# Altium PCB gecko3.PcbDoc (part 4 of 8)
Units mm, origin at the board's own origin, x right, y up, seen from the top; angles counter-clockwise.
Board outline 85.5 x 54.02 mm, 10 copper layers (Top Layer, MidLayer1, 1.2 & 2.5V Plane, GND Plane1, DDR layer 1, 3.3V Plane, DDR layer 2, GND Plane2, MidLayer2, Bottom Layer), stack 1.39 mm thick; 295 components, 567 nets, 2310 pads, 1568 vias.
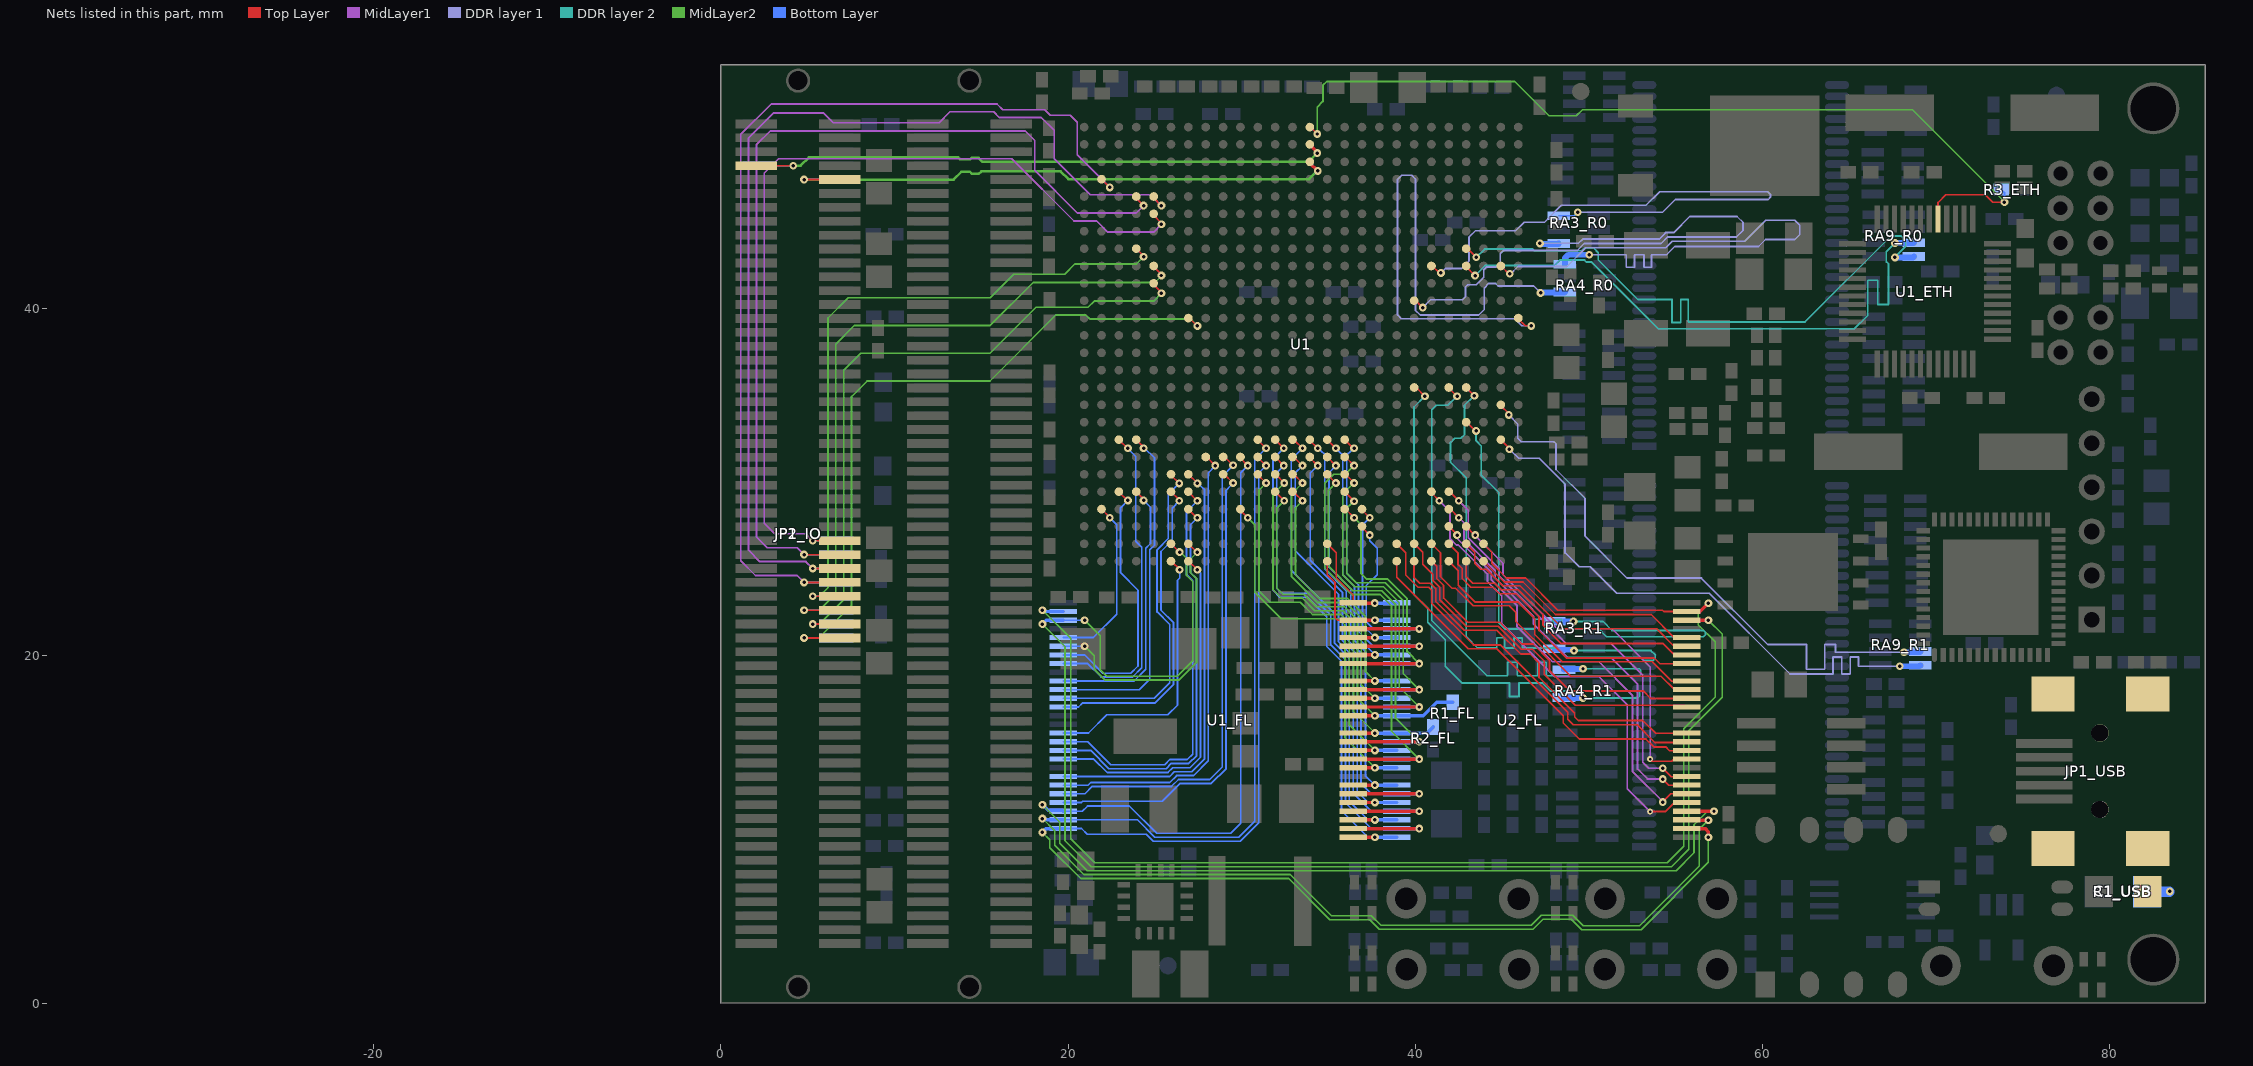
[diagram p12: the nets of this part, all layers, seen from the top]

## Via types
v1: diameter 0.45, hole 0.2, Top Layer to Bottom Layer, tented both sides, 1470 vias
v2: diameter 0.45, hole 0.2, Top Layer to Bottom Layer, tented bottom, 62 vias
v3: diameter 0.35, hole 0.15, Top Layer to MidLayer1, tented both sides, 26 vias
v4: diameter 0.45, hole 0.2, MidLayer2 to Bottom Layer, tented both sides, 10 vias

## Nets (pads, with @x,y where several pads share a name; then routed paths per layer and width w, separated by ;. In a path a pad name is that pad's centre, name@x,y a point inside that pad or via, vN(x,y) a via of type N, cw(c..) or ccw(c..) an arc to the next point about the centre after c; other vN are vias at no path point) (continued)
DRAM_LDM0: RA4_R0.4 U1.V2 | length 36.7
  Top Layer w0.1: U1.V2@44.927,42.449 44.927,42.498 U1.V2@44.952,42.473 ; U1.V2@44.962,42.419 45.411,41.971 v1@45.436,41.946
  DDR layer 1 w0.101: v1@45.436,41.946 45.461,41.971 45.911,42.421 48.736,42.421 49.811,43.496 54.411,43.496 54.789,43.874 58.964,43.874 60.173,45.084 61.848,45.084 62.136,44.796 62.136,44.261 61.85,43.975 60.165,43.975 59.761,43.571 54.936,43.571 54.462,43.097 53.6,43.097 53.6,42.375 53.175,42.375 53.175,43.097 52.625,43.097 52.625,42.375 52.15,42.375 52.15,43.097 v1(50.011,43.097)
  Bottom Layer w0.34: RA4_R0.4@48.611,42.546 48.611,42.896 48.812,43.097 v1(50.011,43.097)
  other v1: 45.436,41.996
DRAM_LDM1: RA4_R1.4 U1.L5 | length 35.9
  Top Layer w0.101: U1.L5@41.927,35.449 41.927,35.423 v1(42.4,34.95)
  DDR layer 2 w0.101: v1(42.4,34.95) 41.875,34.425 41.2,34.425 40.944,34.169 40.944,22.031 44.125,18.85 44.5,18.85 44.5,18.846 45.3,18.846 45.3,19.625 45.875,19.625 45.875,18.846 47.061,18.846 47.061,19.625 47.536,19.625 47.536,18.846 52.911,18.846 52.986,18.921 52.986,19.171 52.911,19.246 v1@49.655,19.246
  Bottom Layer w0.34: RA4_R1.4@48.561,19.196 48.612,19.247 v1(49.655,19.247)
DRAM_LDQS0: RA4_R0.2 U1.R1 | length 35.9
  Top Layer w0.1: U1.R1@45.927,39.449 45.927,39.398 46.325,39 v1(46.675,39)
  DDR layer 1 w0.101: v1(46.675,39) 46.125,39 45.722,39.403 39.197,39.403 38.977,39.623 38.977,47.437 39.211,47.671 39.786,47.671 40.002,47.455 40.002,39.903 40.277,39.628 43.644,39.628 43.961,39.945 43.961,41.171 44.236,41.446 44.611,41.446 44.761,41.296 46.811,41.296 v1(47.211,40.896)
  Bottom Layer w0.34: v1@47.211,40.921 48.586,40.921 RA4_R0.2@48.611,40.946
DRAM_LDQS1: RA4_R1.2 U1.L7 | length 35.4
  Top Layer w0.1: U1.L7@39.927,35.449 U1.L7@40.001,35.449
  Top Layer w0.101: U1.L7@39.927,35.449 40.051,35.449 v1(40.55,34.95)
  DDR layer 2 w0.101: v1(40.55,34.95) 39.925,34.325 39.925,23.525 40.718,22.732 40.718,21.932 41.725,20.925 41.725,19.4 42.7,18.425 45.425,18.425 45.425,17.65 45.975,17.65 45.975,18.425 47.325,18.425 47.779,17.971 52.813,17.971 52.912,17.872 52.912,17.672 52.811,17.571 v1(49.655,17.571)
  Bottom Layer w0.34: RA4_R1.2@48.561,17.596 48.586,17.571 v1(49.655,17.571)
DRAM_R\A\S\0: RA3_R0.3 U1.V6 | length 35.4
  Top Layer w0.101: U1.V6@40.927,42.449 40.976,42.449 41.375,42.05 v1(41.475,42.05)
  DDR layer 1 w0.101: v1(41.475,42.05) 41.721,42.296 42.661,42.296 43.086,42.721 43.086,44.096 43.465,44.475 45.765,44.475 46.261,44.971 47.436,44.971 48.411,45.946 53.286,45.946 54.068,46.728 60.297,46.728 60.45,46.575 60.45,46.4 60.325,46.275 54.965,46.275 54.236,45.546 v1(49.355,45.546)
  Bottom Layer w0.101: RA3_R0.3@48.261,45.346 49.155,45.346 v1(49.355,45.546) ; v1@49.32,45.546 49.32,45.58 v1@49.336,45.596
DRAM_R\A\S\1: RA3_R1.3 U1.J4 | length 35.9
  Top Layer w0.1: U1.J4@42.927,33.449 42.951,33.449 v1@43.45,32.95
  DDR layer 2 w0.101: v1(43.5,32.95) 43.5,32.38 43.8,32.08 43.8,30.4 44.8,29.4 44.8,21.9 45.154,21.546 46.875,21.546 46.875,22.096 47.45,22.096 47.45,21.55 47.925,21.55 47.925,22.096 48.425,22.096 48.425,21.546 50.561,21.546 51.011,21.096 56.586,21.096 56.711,21.221 56.711,21.346 56.601,21.456 51.326,21.456 50.811,21.971 v1(49.1,21.975)
  Bottom Layer w0.34: RA3_R1.3@48.011,21.996 48.036,21.971 v1(49.1,21.975)
DRAM_UDM0: RA9_R0.7 U1.V4 | length 35.2
  Top Layer w0.101: U1.V4@42.927,42.449 42.927,42.405 v1(43.436,41.896)
  DDR layer 2 w0.1: v1(43.436,41.896) 44.015,42.475 48.015,42.475 48.336,42.796 49.736,42.796 49.861,42.671 50.161,42.671 53.995,38.837 65.287,38.837 66.05,39.6 66.05,41.625 66.625,41.625 66.625,40.225 67.25,40.225 67.25,42.575 67.125,42.7 67.125,43.275 v1(67.616,43.766)
  Bottom Layer w0.34: v1(67.616,43.766) 68.684,43.766 RA9_R0.7@68.709,43.791
DRAM_UDM1: RA9_R1.7 U1.K2 | length 35.9
  Top Layer w0.1: U1.K2@44.927,34.449 44.927,34.398 45.375,33.95 v1(45.375,33.875)
  DDR layer 1 w0.101: v1(45.375,33.875) 45.9,33.35 45.9,32.525 46.1,32.325 47.975,32.325 48.1,32.2 48.1,30.73 49.775,29.055 49.775,26.887 52.188,24.474 56.476,24.474 60.3,20.65 62.525,20.65 62.525,19.225 63.575,19.225 63.575,20.65 64.2,20.65 64.2,20.2 v1(68.15,20.2)
  Bottom Layer w0.34: v1(68.15,20.2) 69.061,20.221 RA9_R1.7@69.086,20.246
DRAM_UDQS0: RA9_R0.8 U1.W4 | length 35.8
  Top Layer w0.1: U1.W4@42.927,43.449 43.008,43.449 v1(43.511,42.946)
  DDR layer 2 w0.1: 49.739,43.499 50.258,43.499 50.536,43.221 50.536,42.796 52.811,40.521 54.786,40.521 ; 62.436,39.221 67.39,44.175 67.975,44.175 68.25,43.9 68.25,43.575 v1(67.616,42.94)
  DDR layer 2 w0.101: v1(43.511,42.946) 43.986,43.421 46.761,43.421 46.852,43.33 49.57,43.33 49.739,43.499 ; 54.786,40.521 54.786,39.196 55.286,39.196 55.286,40.521 55.711,40.521 55.711,39.221 62.436,39.221
  Bottom Layer w0.34: v1(67.616,42.94) 68.659,42.94 RA9_R0.8@68.709,42.991
DRAM_UDQS1: RA9_R1.8 U1.H2 | length 35.5
  Top Layer w0.101: U1.H2@44.927,32.449 v1@45.414,31.961
  DDR layer 1 w0.101: v1@45.421,31.904 45.947,31.378 47.127,31.378 48.625,29.88 48.625,25.925 49.429,25.121 50.066,25.121 51.591,23.596 56.929,23.596 61.575,18.95 64.05,18.95 64.05,19.925 64.55,19.925 64.55,18.95 65.05,18.95 65.05,19.925 65.525,19.925 65.525,19.4 ; 65.525,19.395 v1(67.892,19.395)
  Bottom Layer w0.34: v1(67.892,19.395) 69.035,19.395 RA9_R1.8@69.086,19.446
  other v1: 45.414,31.897
DRAM_W\E\0: RA3_R0.1 U1.T7 | length 35.9
  Top Layer w0.1: U1.T7@39.927,40.449 40.026,40.449 v1(40.425,40.05)
  DDR layer 1 w0.1: v1(40.425,40.05) 40.875,40.5 42.715,40.5 42.886,40.671 42.886,41.246 43.011,41.371 43.511,41.371 43.936,41.796 43.936,42.221 44.111,42.396 44.661,42.396 44.886,42.621 44.886,43.146 45.086,43.346 49.336,43.346 49.736,43.746 54.161,43.746 54.536,44.121 57.386,44.121 ; v1@47.168,43.721 v1(47.175,43.75) 49.386,43.746 49.636,43.996 54.036,43.996 54.411,44.371 54.871,44.371 55.8,45.3 57.082,45.3
  DDR layer 1 w0.101: 57.082,45.3 58.525,45.3 58.875,44.95 58.875,44.5 58.496,44.121 57.386,44.121
  Bottom Layer w0.34: v1@47.167,43.721 47.175,43.721 48.236,43.721 RA3_R0.1@48.261,43.746
DRAM_W\E\1: RA3_R1.1 U1.L4 | length 35.7
  Top Layer w0.1: U1.L4@42.927,35.449 42.927,35.438 43.397,34.968 v1@43.415,34.95
  DDR layer 2 w0.101: v1@43.385,34.985 42.827,34.427 42.827,32.727 42.625,32.525 42.275,32.525 42.025,32.275 42.025,31.15 42.925,30.25 42.925,21.107 43.582,20.45 44.686,20.45 44.686,21.044 45.136,21.044 45.136,20.45 45.675,20.45 45.675,21.025 46.15,21.025 46.15,20.45 48.15,20.45 48.701,19.899 52.988,19.899 53.166,19.721 53.661,19.721 53.811,19.871 53.811,20.051 53.566,20.296 v1(49.136,20.296) ; v1@43.4,34.975 v1@43.402,34.973
  Bottom Layer w0.34: RA3_R1.1@48.011,20.396 48.062,20.345 v1@49.105,20.345
  other v1: 43.4,34.97
EARTH: C1_USB.1 JP1_USB. JP1_USB.shield R1_USB.1 | length 1.3
  Bottom Layer w0.6: R1_USB.1@82.133,6.405 v1@83.43,6.405
  other v1: 83.45,6.425
ENCODER0: JP1_IO.62 JP2_IO.62 U1.AA22 | length 52.2
  Top Layer w0.1: v1(5.3,26.625) JP2_IO.62@6.85,26.625 ; U1.AA22@24.927,45.449 24.927,45.373 25.375,44.925 v1(25.375,44.85)
  MidLayer1 w0.1: v1(5.3,26.625) 4.9,27.025 3.1,27.025 2.5,27.625 2.5,47.8 3.325,48.625 16.75,48.625 20.337,45.038 21.643,45.038 22.28,44.4 24.925,44.4 v1(25.375,44.85)
  Bottom Layer w0.1: v1(5.3,26.625) JP1_IO.62@6.65,26.625
ENCODER1: JP1_IO.64 JP2_IO.64 U1.AB23 | length 56.1
  Top Layer w0.1: v1(4.8,25.825) JP2_IO.64@6.85,25.825 ; U1.AB23@23.927,46.449 23.927,46.348 v1(24.35,45.925)
  MidLayer1 w0.1: v1(4.8,25.825) 4.4,26.225 2.675,26.225 2.05,26.85 2.05,49.425 2.85,50.225 17.525,50.225 18.075,49.675 18.075,47.955 20.53,45.5 23.925,45.5 v1(24.35,45.925)
  Bottom Layer w0.1: v1(4.8,25.825) JP1_IO.64@6.65,25.825
ENCODER2: JP1_IO.66 JP2_IO.66 U1.AB22 | length 59.5
  Top Layer w0.1: v1(5.3,25.025) JP2_IO.66@6.85,25.025 ; U1.AB22@24.927,46.449 24.927,46.373 v1(25.375,45.925)
  MidLayer1 w0.1: v1(5.3,25.025) 4.9,25.425 2.25,25.425 1.6,26.075 1.6,49.825 3.027,51.253 5.922,51.253 6.472,50.703 12.578,50.703 13.2,51.325 15.718,51.325 16.043,51 18.455,51 19.2,50.255 19.2,48.63 21.28,46.55 24.75,46.55 v1(25.375,45.925)
  Bottom Layer w0.1: v1(5.3,25.025) JP1_IO.66@6.65,25.025
ENCODER3: JP1_IO.68 JP2_IO.68 U1.AC25 | length 58.3
  Top Layer w0.1: v1(4.8,24.225) JP2_IO.68@6.85,24.225 ; U1.AC25@21.927,47.449 v1(22.4,46.975)
  MidLayer1 w0.1: v1(4.8,24.225) 4.4,24.625 2,24.625 1.15,25.475 1.15,50.024 2.902,51.776 15.904,51.776 16.23,51.45 18.65,51.45 18.975,51.125 20.125,51.125 20.525,50.725 20.525,48.85 v1(22.4,46.975)
  Bottom Layer w0.1: v1(4.8,24.225) JP1_IO.68@6.65,24.225
ENCODER4: JP1_IO.70 JP2_IO.70 U1.W23 | length 39.8
  Top Layer w0.1: v1(5.3,23.425) JP2_IO.70@6.85,23.425 ; U1.W23@23.927,43.449 24.35,43.026 v1(24.35,42.975)
  MidLayer2 w0.1: v1(5.3,23.425) 5.675,23.425 6.175,23.925 6.175,39.45 7.35,40.625 15.525,40.625 16.869,41.969 19.799,41.969 20.399,42.569 23.944,42.569 v1(24.35,42.975)
  Bottom Layer w0.1: v1(5.3,23.425) JP1_IO.70@6.65,23.425
ENCODER5: JP1_IO.72 JP2_IO.72 U1.V22 | length 41.6
  Top Layer w0.1: v1(4.8,22.625) JP2_IO.72@6.85,22.625 ; U1.V22@24.927,42.398 v1@25.415,41.91
  MidLayer2 w0.1: v1(4.8,22.625) 5.675,22.625 6.625,23.575 6.625,37.95 7.7,39.025 15.525,39.025 18,41.5 25.006,41.5 v1@25.415,41.91
  Bottom Layer w0.1: v1(4.8,22.625) JP1_IO.72@6.65,22.625
  other v1: 25.375,41.9
ENCODER6: JP1_IO.74 JP2_IO.74 U1.U22 | length 39.4
  Top Layer w0.1: v1(5.3,21.825) JP2_IO.74@6.85,21.825 ; U1.U22@24.927,41.449 24.927,41.373 v1@25.425,40.875
  MidLayer2 w0.1: v1(5.3,21.825) 5.675,21.825 7.075,23.225 7.075,36.45 8.05,37.425 15.5,37.425 18.15,40.075 21.15,40.075 21.5,40.425 24.925,40.425 v1(25.375,40.875)
  Bottom Layer w0.1: v1(5.3,21.825) JP1_IO.74@6.65,21.825
ENCODER7: JP1_IO.76 JP2_IO.76 U1.R20 | length 42.2
  Top Layer w0.1: v1@4.825,21.025 JP2_IO.76@6.85,21.025 ; U1.R20@26.927,39.449 26.976,39.449 v1@27.425,39
  MidLayer2 w0.1: v1(4.8,21.025) 5.65,21.025 7.525,22.9 7.525,34.925 8.425,35.825 15.5,35.825 19.3,39.625 21.025,39.625 21.25,39.4 27.05,39.4 v1(27.45,39)
  Bottom Layer w0.1: v1(4.8,21.025) 4.825,21.025 JP1_IO.76@6.65,21.025
ETH_R\E\S\E\T\: R3_ETH.2 U1.AF13 U1_ETH.29 | length 52.2
  Top Layer w0.1: U1.AF13@33.927,50.449 33.951,50.449 v1(34.35,50.05) ; U1_ETH.29@70.1,45.15 70.1,46.1 70.55,46.55 72.825,46.55 73.25,46.125 v1(73.925,46.125)
  MidLayer2 w0.1: v1(34.35,50.05) 34.35,51.6 34.675,51.925 34.675,52.85 34.9,53.075 45.725,53.075 47.7,51.1 49.275,51.1 49.625,51.45 68.63,51.45 v1@73.927,46.153
  Bottom Layer w0.1: R3_ETH.2@73.55,46.85 R3_ETH.2@73.75,46.65 ; R3_ETH.2@73.75,46.85 73.925,46.675 v1(73.925,46.125)
EXTCLK0: JP1_IO.7 JP2_IO.7 U1.AE13 | length 35.5
  Top Layer w0.1: JP2_IO.7@2.05,48.225 v1(4.175,48.225)
  Top Layer w0.2: U1.AE13@33.927,49.449 33.927,49.423 34.35,49 v1(34.35,48.95)
  MidLayer2 w0.15: v1(4.175,48.225) 4.6,48.225 5.075,48.7 13.675,48.7 13.775,48.6 14.375,48.6 14.45,48.675 14.85,48.675 15.075,48.45 33.85,48.45 v1(34.35,48.95)
  Bottom Layer w0.1: JP1_IO.7@2.25,48.225 v1(4.175,48.225)
EXTCLK1: JP1_IO.10 JP2_IO.10 U1.AD13 | length 35
  Top Layer w0.1: v1(4.8,47.425) JP2_IO.10@6.85,47.425
  Top Layer w0.2: U1.AD13@33.927,48.449 33.927,48.373 v1(34.375,47.925)
  MidLayer2 w0.15: v1(4.8,47.425) 13.4,47.425 13.85,47.875 14.337,47.875 14.463,47.75 14.85,47.75 15,47.9 19.575,47.9 20.025,47.45 33.874,47.45 34.399,47.976 v1(34.375,47.925)
  Bottom Layer w0.1: v1(4.8,47.425) JP1_IO.10@6.65,47.425
FLASH_A0: U1.G17 U1_FL.32 U2_FL.32 | length 79
  Top Layer w0.1: U1.G17@29.927,31.449 29.927,31.373 v1(30.35,30.95) v1@30.425,30.951
  Top Layer w0.2: U2_FL.32@55.625,11.05 v1(57.2,11.05)
  MidLayer2 w0.1: v4(18.525,11.425) 19.525,10.425 19.525,9.205 21.105,7.625 55.025,7.625 56.05,8.65 56.05,10.275 56.825,11.05 v1(57.2,11.05)
  Bottom Layer w0.1: U1_FL.32@19.725,11.05 20.825,11.05 21.125,11.35 23.525,11.35 25.1,9.775 29.375,9.775 29.95,10.35 29.95,30.55 v1(30.35,30.95)
  Bottom Layer w0.2: v4(18.525,11.425) 18.85,11.1 19.675,11.1 U1_FL.32@19.725,11.05
FLASH_A1: U1.H15 U1_FL.28 U2_FL.28 | length 29.4
  Top Layer w0.1: U1.H15@31.927,32.448 v1(32.425,31.95)
  Top Layer w0.2: U2_FL.28@36.425,9.55 v1(37.675,9.55)
  Bottom Layer w0.1: v1(32.425,31.95) 31.8,31.325 31.8,23.775 32.2,23.375 33.764,23.375 34.9,22.239 34.9,20.53 35.75,19.68 35.75,11.075 37.275,9.55 v1(37.675,9.55)
  Bottom Layer w0.2: v1(37.675,9.55) U1_FL.28@38.925,9.55
FLASH_A2: U1.G15 U1_FL.27 U2_FL.27 | length 31.5
  Top Layer w0.1: U1.G15@31.927,31.448 v1(32.425,30.95)
  Top Layer w0.2: U2_FL.27@36.425,10.05 v1(40.225,10.05)
  Bottom Layer w0.1: v1(32.425,30.95) 32.025,30.55 32.025,23.875 32.3,23.6 33.857,23.6 35.125,22.332 35.125,20.624 35.975,19.774 35.975,11.525 37.45,10.05 U1_FL.27@38.925,10.05
  Bottom Layer w0.2: U1_FL.27@38.925,10.05 v1(40.225,10.05)
FLASH_A3: U1.H14 U1_FL.26 U2_FL.26 | length 27.2
  Top Layer w0.1: U1.H14@32.927,32.449 33.001,32.449 v1(33.5,31.95)
  Top Layer w0.2: U2_FL.26@36.425,10.55 v1(37.675,10.55)
  Bottom Layer w0.1: v1(33.5,31.95) 32.852,31.302 32.852,24.923 35.35,22.425 35.35,20.717 36.2,19.867 36.2,11.625 37.275,10.55 v1(37.675,10.55)
  Bottom Layer w0.2: v1(37.675,10.55) U1_FL.26@38.925,10.55
FLASH_A4: U1.G14 U1_FL.25 U2_FL.25 | length 29.2
  Top Layer w0.1: U1.G14@33.002,31.448 v1(33.5,30.95)
  Top Layer w0.2: U2_FL.25@36.425,11.05 v1(40.225,11.05)
  Bottom Layer w0.1: v1(33.5,30.95) 33.088,30.538 33.088,26.037 35.575,23.55 35.575,20.81 36.425,19.96 36.425,12.075 37.45,11.05 U1_FL.25@38.925,11.05
  Bottom Layer w0.2: U1_FL.25@38.925,11.05 v1(40.225,11.05)
FLASH_A5: U1.G13 U1_FL.24 U2_FL.24 | length 24.5
  Top Layer w0.1: U1.G13@33.877,31.448 v1(34.375,30.95)
  Top Layer w0.2: U2_FL.24@36.425,11.55 v1(37.675,11.55)
  Bottom Layer w0.1: v1(34.375,30.95) 33.95,30.525 33.95,25.5 35.8,23.65 35.8,20.903 36.65,20.053 36.65,12.2 37.276,11.574 37.651,11.574 v1(37.675,11.55)
  Bottom Layer w0.2: v1(37.675,11.55) U1_FL.24@38.925,11.55
FLASH_A6: U1.H13 U1_FL.23 U2_FL.23 | length 28.4
  Top Layer w0.1: U1.H13@33.927,32.449 33.927,32.398 v1(34.375,31.95)
  Top Layer w0.2: U2_FL.23@36.425,12.05 v1(40.225,12.05)
  Bottom Layer w0.1: v1(34.375,31.95) 34.775,31.6 34.775,25 36.025,23.75 36.025,20.996 36.875,20.146 36.875,12.625 37.45,12.05 U1_FL.23@38.925,12.05
  Bottom Layer w0.2: U1_FL.23@38.925,12.05 v1(40.225,12.05)
FLASH_A7: U1.G12 U1_FL.22 U2_FL.22 | length 22.9
  Top Layer w0.1: U1.G12@34.927,31.449 v1(35.425,30.95)
  Top Layer w0.2: U2_FL.22@36.425,12.55 v1(37.675,12.55)
  Bottom Layer w0.1: v1(35.425,30.95) 35.025,30.55 35.025,25.104 36.275,23.854 36.275,21.1 37.125,20.25 37.125,13.1 v1(37.675,12.55)
  Bottom Layer w0.2: v1(37.675,12.55) U1_FL.22@38.925,12.55
FLASH_A8: U1.D17 U1_FL.20 U2_FL.20 | length 22.6
  Top Layer w0.1: U1.D17@29.852,28.448 v1(30.35,27.95)
  Top Layer w0.2: U2_FL.20@36.425,13.55 v1(37.675,13.55)
  MidLayer2 w0.1: v1(30.35,27.95) 30.75,27.55 30.75,23.65 32.275,22.125 35.6,22.125 35.95,21.775 35.95,15.275 v1(37.675,13.55)
  Bottom Layer w0.2: v1(37.675,13.55) U1_FL.20@38.925,13.55
FLASH_A9: U1.G11 U1_FL.19 U2_FL.19 | length 27.1
  Top Layer w0.1: U1.G11@35.927,31.449 35.976,31.449 v1(36.475,30.95)
  Top Layer w0.2: U2_FL.19@36.425,14.05 v1(40.225,14.05)
  MidLayer2 w0.1: v1(36.475,30.95) 35.925,30.45 35.302,30.45 34.777,29.925 34.777,25.054 36.307,23.525 37.982,23.525 38.625,22.882 38.625,15.65 v1(40.225,14.05)
  Bottom Layer w0.2: U1_FL.19@38.925,14.05 v1(40.225,14.05)
FLASH_A10: U1.F16 U1_FL.18 U2_FL.18 | length 23.5
  Top Layer w0.1: U1.F16@30.902,30.448 v1(31.4,29.95)
  Top Layer w0.2: U2_FL.18@36.425,14.55 v1(37.675,14.55)
  MidLayer2 w0.1: v1(31.4,29.95) 31,29.55 31,23.72 31.645,23.075 33.379,23.075 34.079,22.375 35.704,22.375 36.2,21.879 36.2,16.025 v1(37.675,14.55)
  Bottom Layer w0.2: v1(37.675,14.55) U1_FL.18@38.925,14.55
FLASH_A11: U1.F12 U1_FL.17 U2_FL.17 | length 24
  Top Layer w0.1: U1.F12@34.927,30.449 v1(35.425,29.95)
  Top Layer w0.2: U2_FL.17@36.425,15.05 v1(40.225,15.05)
  MidLayer2 w0.1: v1(35.425,29.95) 35.002,29.527 35.002,25.148 36.4,23.75 38.075,23.75 38.85,22.975 38.85,16.425 v1(40.225,15.05)
  Bottom Layer w0.2: U1_FL.17@38.925,15.05 v1(40.225,15.05)
FLASH_A12: U1.F11 U1_FL.13 U2_FL.13 | length 21.8
  Top Layer w0.1: U1.F11@35.927,30.449 35.976,30.449 v1(36.475,29.95)
  Top Layer w0.2: U2_FL.13@36.425,17.05 v1(40.225,17.05)
  MidLayer2 w0.1: v1(36.475,29.95) 35.825,29.35 35.825,24.657 36.507,23.975 38.169,23.975 39.075,23.069 39.075,18.2 v1(40.225,17.05)
  Bottom Layer w0.2: U1_FL.13@38.925,17.05 v1(40.225,17.05)
FLASH_A13: U1.F14 U1_FL.12 U2_FL.12 | length 18.8
  Top Layer w0.1: U1.F14@33.002,30.448 v1(33.5,29.95)
  Top Layer w0.2: U2_FL.12@36.425,17.55 v1(37.675,17.55)
  MidLayer2 w0.1: v1(33.5,29.95) 32.862,29.312 32.862,24.577 34.377,23.063 36.002,23.063 36.887,22.177 36.887,18.338 v1(37.675,17.55)
  Bottom Layer w0.2: v1(37.675,17.55) U1_FL.12@38.925,17.55
FLASH_A14: U1.E11 U1_FL.11 U2_FL.11 | length 19.6
  Top Layer w0.1: U1.E11@35.927,29.449 v1(36.475,28.9)
  Top Layer w0.2: U2_FL.11@36.425,18.05 v1(40.225,18.05)
  MidLayer2 w0.1: v1(36.475,28.9) 36.05,28.525 36.05,24.75 36.6,24.2 38.262,24.2 39.3,23.162 39.3,18.975 v1(40.225,18.05)
  Bottom Layer w0.2: U1_FL.11@38.925,18.05 v1(40.225,18.05)
FLASH_A15: U1.E14 U1_FL.10 U2_FL.10 | length 16.6
  Top Layer w0.1: U1.E14@33.002,29.423 v1(33.5,28.925)
  Top Layer w0.2: U2_FL.10@36.425,18.55 v1(37.675,18.55)
  MidLayer2 w0.1: v1(33.5,28.925) 33.1,28.525 33.1,24.675 34.475,23.3 36.1,23.3 37.125,22.275 37.125,19.1 v1(37.675,18.55)
  Bottom Layer w0.2: v1(37.675,18.55) U1_FL.10@38.925,18.55
FLASH_A16: U1.D11 U1_FL.8 U2_FL.8 | length 16.5
  Top Layer w0.1: U1.D11@35.927,28.449 35.976,28.449 v1(36.475,27.95)
  Top Layer w0.2: U2_FL.8@36.425,19.525 36.45,19.55 v1(40.225,19.55)
  MidLayer2 w0.1: v1(36.475,27.95) 36.875,27.55 36.875,24.725 37.175,24.425 38.387,24.425 39.525,23.287 39.525,20.25 v1(40.225,19.55)
  Bottom Layer w0.2: U1_FL.8@38.925,19.55 v1(40.225,19.55)
FLASH_A17: U1.H12 U1_FL.7 U2_FL.7 | length 16
  Top Layer w0.1: U1.H12@34.927,32.448 v1(35.425,31.95)
  Top Layer w0.2: U2_FL.7@36.425,20.05 v1(37.675,20.05)
  Bottom Layer w0.1: v1(35.425,31.95) 35.825,31.55 35.825,24.65 36.5,23.975 36.5,21.225 v1(37.675,20.05)
  Bottom Layer w0.2: v1(37.675,20.05) U1_FL.7@38.925,20.05
FLASH_A18: U1.H11 U1_FL.6 U2_FL.6 | length 19.4
  Top Layer w0.1: U1.H11@35.927,32.449 v1@36.425,31.951
  Top Layer w0.2: U2_FL.6@36.425,20.55 v1(40.225,20.55)
  Top Layer w0.254: v1@36.425,31.951 v1(36.475,31.95)
  Bottom Layer w0.1: v1(36.475,31.95) 36.052,31.577 36.052,24.748 36.725,24.075 36.725,21.4 37.575,20.55 U1_FL.6@38.925,20.55
  Bottom Layer w0.2: U1_FL.6@38.925,20.55 v1(40.225,20.55)
FLASH_A19: U1.D10 U1_FL.5 U2_FL.5 | length 10.6
  Top Layer w0.1: U1.D10@36.927,28.449 36.927,28.398 v1(37.375,27.95)
  Top Layer w0.2: U2_FL.5@36.425,21.05 v1(37.675,21.05)
  Bottom Layer w0.1: v1(37.375,27.95) 36.95,27.525 36.95,21.775 v1(37.675,21.05)
  Bottom Layer w0.2: v1(37.675,21.05) U1_FL.5@38.925,21.05
FLASH_A20: U1.C10 U1_FL.4 U2_FL.4 | length 13.1
  Top Layer w0.1: U1.C10@36.927,27.449 36.927,27.398 v1(37.375,26.95)
  Top Layer w0.2: U2_FL.4@36.425,21.525 36.45,21.55 v1(40.225,21.55)
  Bottom Layer w0.1: v1(37.375,26.95) 37.375,26.625 37.8,26.2 37.8,24.675 37.175,24.05 37.175,21.95 37.575,21.55 U1_FL.4@38.925,21.55
  Bottom Layer w0.2: U1_FL.4@38.925,21.55 v1(40.225,21.55)
FLASH_A21: U1.A12 U1_FL.3 U2_FL.3 | length 7
  Top Layer w0.1: U1.A12@34.927,25.449 34.927,24.673 35.375,24.225 35.375,22.2 35.525,22.05 U2_FL.3@36.425,22.05
  Top Layer w0.2: U2_FL.3@36.45,22.05 v1(37.675,22.05)
  Bottom Layer w0.2: v1(37.675,22.05) U1_FL.3@38.925,22.05
FLASH_A22: U1.B12 U1_FL.1 U2_FL.1 | length 6.5
  Top Layer w0.1: U1.B12@34.927,26.449 35.45,25.926 35.45,24.475 36.425,23.5 U2_FL.1@36.425,23.05
  Top Layer w0.2: U2_FL.1@36.397,23.036 v1(37.659,23.036)
  Bottom Layer w0.2: v1(37.659,23.036) U1_FL.1@38.911,23.036
FLASH_A23: U1.G16 U1_FL.30 U2_FL.30 | length 80.8
  Top Layer w0.1: U1.G16@30.902,31.448 v1(31.4,30.95)
  Top Layer w0.2: U2_FL.30@55.625,10.05 56.7,10.05 56.875,9.875 v1(56.875,9.55)
  MidLayer2 w0.1: v4(18.525,9.825) 18.95,9.4 18.95,8.95 20.725,7.175 32.7,7.175 35.075,4.8 37.375,4.8 37.925,4.25 46.775,4.25 47.35,4.825 48.975,4.825 49.575,4.225 53,4.225 56.875,8.1 v1(56.875,9.55)
  Bottom Layer w0.1: U1_FL.30@19.725,10.05 20.775,10.05 21.1,9.725 24.5,9.725 24.9,9.325 29.918,9.325 30.975,10.382 30.975,30.525 v1(31.4,30.95)
  Bottom Layer w0.2: v4(18.525,9.825) 18.75,10.05 U1_FL.30@19.725,10.05
FLASH_B\Y\T\E\: U1.H16 U1_FL.31 U2_FL.31 | length 82.4
  Top Layer w0.1: U1.H16@30.927,32.449 30.927,32.423 v1(31.4,31.95)
  Top Layer w0.2: U2_FL.31@55.597,10.536 56.864,10.536 v1(56.875,10.525)
  MidLayer2 w0.1: v4(18.525,10.625) 19.225,9.925 19.225,9.08 20.905,7.4 32.793,7.4 35.168,5.025 37.468,5.025 38.018,4.475 46.682,4.475 47.257,5.05 49.068,5.05 49.668,4.45 52.907,4.45 56.35,7.893 56.35,10 v1(56.875,10.525)
  Bottom Layer w0.1: U1_FL.31@19.725,10.55 24,10.55 25,9.55 29.825,9.55 30.75,10.475 30.75,31.3 v1(31.4,31.95)
  Bottom Layer w0.2: v4(18.525,10.625) 18.6,10.55 U1_FL.31@19.725,10.55
FLASH_C\E\0\: R1_FL.2 U1.E15 U1_FL.14 U2_FL.14 | length 23.3
  Top Layer w0.1: U1.E15@31.952,29.423 v1(32.45,28.925)
  Top Layer w0.2: U2_FL.14@36.425,16.55 v1(37.675,16.55)
  MidLayer2 w0.1: v1(32.45,28.925) 32.025,28.5 32.025,23.9 32.375,23.55 33.571,23.55 34.296,22.825 35.921,22.825 36.662,22.083 36.662,17.563 v1(37.675,16.55)
  Bottom Layer w0.2: v1(37.675,16.55) 40.45,16.55 41.225,17.325 R1_FL.2@42.15,17.325
FLASH_D0_0: U1.F18 U1_FL.33 | length 27.6
  Top Layer w0.1: U1.F18@28.927,30.449 29.001,30.449 v1(29.5,29.95)
  Bottom Layer w0.1: U1_FL.33@19.725,11.55 20.775,11.55 20.85,11.625 25.425,11.625 26.45,12.65 28.25,12.65 29.1,13.5 29.1,29.525 29.128,29.553 v1(29.5,29.95)
FLASH_D0_1: U1.G19 U1_FL.35 | length 26.8
  Top Layer w0.1: U1.G19@27.927,31.449 27.976,31.449 v1(28.475,30.95)
  Bottom Layer w0.1: U1_FL.35@19.725,12.55 21.15,12.55 21.3,12.7 25.85,12.7 26.25,13.1 27.225,13.1 28.075,13.95 28.075,30.523 v1(28.475,30.95)
FLASH_D0_2: U1.A20 U1_FL.38 | length 20.2
  Top Layer w0.1: U1.A20@26.927,25.449 26.951,25.449 v1(27.45,24.95)
  Bottom Layer w0.1: U1_FL.38@19.725,14.05 21.475,14.05 22.25,13.275 25.75,13.275 26.025,13.55 27.025,13.55 27.625,14.15 27.625,24.775 v1(27.45,24.95)
FLASH_D0_3: U1.E20 U1_FL.40 | length 24
  Top Layer w0.1: U1.E20@26.914,29.436 v1@27.438,28.913
  Bottom Layer w0.1: U1_FL.40@19.725,15.05 21.125,15.05 22.45,13.725 25.557,13.725 25.857,14.025 26.864,14.025 27.175,14.336 27.175,24.325 26.825,24.675 26.825,28.3 v1(27.45,28.925)
FLASH_D0_4: U1.E21 U1_FL.44 | length 18.9
  Top Layer w0.1: U1.E21@25.927,29.449 26.426,28.95 v1(26.4,28.925)
  Bottom Layer w0.1: U1_FL.44@19.725,17.05 20.6,17.05 20.825,17.275 25,17.275 26.075,18.35 26.075,21.9 25.35,22.625 25.35,26.007 26,26.657 26,28.496 v1(26.4,28.925)
FLASH_D0_5: U1.H23 U1_FL.46 | length 19.6
  Top Layer w0.1: U1.H23@23.927,32.449 v1@24.425,31.951
  Bottom Layer w0.1: U1_FL.46@19.725,18.05 24.1,18.05 24.7,18.65 24.7,26.1 24.975,26.375 24.975,31.398 v1@24.4,31.95
  other v1: 24.35,31.95
FLASH_D0_6: U1.H24 U1_FL.49 | length 18.7
  Top Layer w0.1: U1.H24@22.927,32.449 v1@23.425,31.951
  Bottom Layer w0.1: U1_FL.49@19.725,19.55 21.125,19.55 21.9,18.775 23.707,18.775 24.25,19.318 24.25,26.25 23.9,26.6 23.9,31.475 v1@23.425,31.95
  other v1: 23.45,31.95
FLASH_D0_7: U1.B20 U1_FL.51 | length 16.7
  Top Layer w0.1: U1.B20@26.927,26.449 27.401,25.975 v1@27.425,25.975
  MidLayer2 w0.1: v4(20.95,20.55) 21.5,20 21.5,19.23 22.13,18.6 26.375,18.6 27.4,19.625 27.4,24.425 27.05,24.775 27.05,25.546 v1@27.425,25.975
  Bottom Layer w0.1: U1_FL.51@19.725,20.55 v4(20.95,20.55)
  other v1: 27.45,25.975
FLASH_D0_8: U1.G18 U1_FL.34 | length 28.3
  Top Layer w0.1: U1.G18@28.927,31.449 29.026,31.449 v1(29.5,30.975) v1@29.401,30.975
  Bottom Layer w0.1: U1_FL.34@19.725,12.05 20.975,12.05 21.4,12.475 25.957,12.475 26.357,12.875 28.157,12.875 28.875,13.593 28.875,30.298 28.877,30.301 v1(29.5,30.975)
FLASH_D0_9: U1.F20 U1_FL.36 | length 25.3
  Top Layer w0.1: U1.F20@26.927,30.449 v1(27.45,29.925)
  Bottom Layer w0.1: U1_FL.36@19.725,13.05 25.85,13.05 26.125,13.325 27.132,13.325 27.85,14.043 27.85,29.597 v1(27.45,29.925)
FLASH_D0_10: U1.D20 U1_FL.39 | length 23.2
  Top Layer w0.1: U1.D20@26.914,28.436 v1@27.438,27.913
  Bottom Layer w0.1: U1_FL.39@19.725,14.55 21.3,14.55 22.35,13.5 25.65,13.5 25.95,13.8 26.957,13.8 27.4,14.243 27.4,24.425 27.05,24.775 27.05,27.55 v1(27.45,27.95)
FLASH_D0_11: U1.A21 U1_FL.41 | length 15.8
  Top Layer w0.1: U1.A21@25.927,25.449 25.951,25.449 v1@26.45,24.95
  Bottom Layer w0.1: U1_FL.41@19.725,15.55 21.175,15.55 22.225,16.6 25.75,16.6 26.3,17.15 26.3,24.35 26.425,24.475 v1(26.425,24.95)
FLASH_D0_12: U1.F21 U1_FL.45 | length 19.5
  Top Layer w0.1: U1.F21@25.927,30.449 25.927,30.398 v1(26.4,29.925)
  Bottom Layer w0.1: U1_FL.45@19.725,17.55 24.957,17.55 25.85,18.443 25.85,21.8 25.125,22.525 25.125,26.1 25.775,26.75 25.775,29.3 v1(26.4,29.925)
FLASH_D0_13: U1.E23 U1_FL.47 | length 15.7
  Top Layer w0.1: U1.E23@23.927,29.449 v1@24.425,28.951
  Bottom Layer w0.1: U1_FL.47@19.725,18.55 23.8,18.55 24.475,19.225 24.475,26.193 24.75,26.468 24.75,28.55 v1(24.35,28.95)
FLASH_D0_14: U1.E24 U1_FL.50 | length 15.7
  Top Layer w0.1: U1.E24@22.902,29.449 v1@23.4,28.951
  Bottom Layer w0.1: U1_FL.50@19.725,20.05 20.943,20.05 21.993,19 23.614,19 24.025,19.411 24.025,23.775 23.025,24.775 23.025,28.525 v1(23.45,28.95)
FLASH_D0_15: U1.D25 U1_FL.52 | length 10
  Top Layer w0.1: U1.D25@21.927,28.449 v1@22.4,27.976
  Bottom Layer w0.1: U1_FL.52@19.725,21.05 21.45,21.05 22.8,22.4 22.8,27.55 v1(22.4,27.95)
FLASH_D1_0: U1.E6 U2_FL.33 | length 27.5
  Top Layer w0.1: U1.E6@40.927,29.449 40.927,29.373 v1(41.375,28.925) ; v3(53.525,11.025) 54.4,11.025 54.911,11.536 U2_FL.33@55.597,11.536
  MidLayer1 w0.1: v1(41.375,28.925) 42,28.3 42,26.73 42.35,26.38 42.477,26.38 44.15,24.707 44.15,24.275 44.975,23.45 44.975,21.85 48.025,18.8 50.575,18.8 52.2,17.175 52.2,12.35 v3(53.525,11.025)
FLASH_D1_1: U1.D5 U2_FL.35 | length 24.2
  Top Layer w0.1: U1.D5@41.927,28.449 42.001,28.449 v1(42.5,27.95) ; v1(54.25,12.9) 54.6,12.55 U2_FL.35@55.625,12.55
  MidLayer1 w0.1: v1(42.5,27.95) 42.8,27.65 42.8,26.7 44.6,24.9 44.6,24.475 46.8,22.275 46.8,21.85 48.775,19.875 51.275,19.875 52.8,18.35 52.8,13.475 53.375,12.9 v1(54.25,12.9)
FLASH_D1_2: U1.C4 U2_FL.38 | length 21.8
  Top Layer w0.1: U1.C4@42.927,27.449 v1@43.425,26.951 ; v3(53.525,14.05) 53.65,13.925 54.775,13.925 54.886,14.036 U2_FL.38@55.597,14.036
  MidLayer1 w0.1: v1@43.425,26.951 45.05,25.326 45.05,24.675 48.175,21.55 51.325,21.55 53.525,19.35 v3(53.525,14.05)
  other v1: 43.45,26.95
FLASH_D1_3: U1.B8 U2_FL.40 | length 22.8
  Top Layer w0.1: U1.B8@38.927,26.449 39.45,25.926 39.45,24.65 40.15,23.95 40.764,23.95 40.95,23.764 40.95,23.025 43.35,20.625 44.9,20.625 48.775,16.75 48.775,16.35 49.097,16.028 52.772,16.028 53.8,15 55.561,15 U2_FL.40@55.597,15.036
FLASH_D1_4: U1.B7 U2_FL.44 | length 21
  Top Layer w0.1: U1.B7@39.927,26.449 40.425,25.951 40.425,25.275 41,24.7 41,24.35 41.4,23.95 41.4,23.23 42.93,21.7 44.782,21.7 46.107,20.375 46.75,20.375 47.425,19.7 47.425,18.925 49.2,17.15 55.483,17.15 U2_FL.44@55.597,17.036
FLASH_D1_5: U1.B6 U2_FL.46 | length 19.3
  Top Layer w0.1: U1.B6@40.927,26.449 41.45,25.926 41.45,24.55 42.109,23.891 42.309,23.891 43.325,22.875 45.4,22.875 45.775,22.5 45.775,21.975 46.775,20.975 46.805,20.975 48.955,18.825 54.15,18.825 54.939,18.036 U2_FL.46@55.597,18.036
FLASH_D1_6: U1.B5 U2_FL.49 | length 17.7
  Top Layer w0.1: U1.B5@41.927,26.449 42.45,25.926 42.45,25.275 42.702,25.023 42.702,24.448 43.2,23.95 44.471,23.95 44.846,23.575 45.8,23.575 47.123,22.252 47.123,21.452 48.697,19.878 53.747,19.878 54.089,19.536 U2_FL.49@55.597,19.536
FLASH_D1_7: U1.B4 U2_FL.51 | length 15.5
  Top Layer w0.1: U1.B4@42.927,26.449 43.425,25.951 43.425,25.325 43.775,24.975 44.083,24.975 45.033,24.025 46.025,24.025 48.5,21.55 53.9,21.55 54.914,20.536 U2_FL.51@55.597,20.536
FLASH_D1_8: U1.C5 U2_FL.34 | length 24.1
  Top Layer w0.1: U1.C5@41.927,27.449 v1@42.388,26.988 ; v1(54.25,11.575) 54.25,11.6 54.7,12.05 U2_FL.34@55.625,12.05
  MidLayer1 w0.1: v1(42.4,26.95) 42.4,26.775 44.375,24.8 44.375,24.375 45.85,22.9 45.85,21.7 47.9,19.65 50.575,19.65 52.5,17.725 52.5,13.35 v1@54.262,11.588
FLASH_D1_9: U1.E5 U2_FL.36 | length 24.6
  Top Layer w0.1: U1.E5@41.927,29.449 41.976,29.449 v1(42.5,28.925) ; v1(54.25,13.525) 54.739,13.036 U2_FL.36@55.597,13.036
  MidLayer1 w0.1: v1(42.5,28.925) 43.044,28.381 43.044,26.786 44.825,25.005 44.825,24.575 48.7,20.7 51.275,20.7 53.102,18.873 53.102,13.873 53.45,13.525 v1(54.25,13.525)
FLASH_D1_10: U1.A8 U2_FL.39 | length 22
  Top Layer w0.1: U1.A8@38.927,25.449 38.927,24.528 43.055,20.4 44.68,20.4 48.525,16.555 48.525,16.125 49.45,15.2 53.282,15.2 53.732,14.75 54.425,14.75 54.639,14.536 U2_FL.39@55.597,14.536
FLASH_D1_11: U1.A7 U2_FL.41 | length 21.4
  Top Layer w0.1: U1.A7@39.927,25.449 39.927,24.5 40.252,24.175 40.857,24.175 41.175,23.857 41.175,23.125 42.825,21.475 44.689,21.475 46.064,20.1 46.6,20.1 47.125,19.575 47.125,18.75 49.175,16.7 49.175,16.475 49.375,16.275 53.1,16.275 53.839,15.536 U2_FL.41@55.625,15.536
FLASH_D1_12: U1.A6 U2_FL.45 | length 19.1
  Top Layer w0.1: U1.A6@40.927,25.449 41.225,25.151 41.225,24.45 41.625,24.05 41.625,23.325 43.025,21.925 44.875,21.925 46.125,20.675 46.775,20.675 47.73,19.72 47.73,19.145 48.9,17.975 53.125,17.975 53.564,17.536 U2_FL.45@55.597,17.536
FLASH_D1_13: U1.A5 U2_FL.47 | length 17.6
  Top Layer w0.1: U1.A5@41.927,25.449 42.477,24.899 42.477,24.053 43.43,23.1 45.9,23.1 46.875,22.125 46.875,21.228 48.45,19.653 53.647,19.653 54.764,18.536 U2_FL.47@55.597,18.536
FLASH_D1_14: U1.A4 U2_FL.50 | length 15.8
  Top Layer w0.1: U1.A4@42.927,25.449 42.927,24.548 43.3,24.175 44.565,24.175 44.94,23.8 45.925,23.8 47.35,22.375 47.35,21.75 48.4,20.7 54.275,20.7 54.939,20.036 U2_FL.50@55.597,20.036
FLASH_D1_15: U1.A3 U2_FL.52 | length 13.5
  Top Layer w0.1: U1.A3@43.927,25.449 45.126,24.25 46.2,24.25 48.072,22.378 53.577,22.378 54.919,21.036 U2_FL.52@55.597,21.036
FLASH_O\E\: U1.B21 U1_FL.54 U2_FL.54 | length 84.4
  Top Layer w0.1: U1.B21@25.927,26.449 26.401,25.975 v1@26.45,25.975
  Top Layer w0.2: U2_FL.54@55.597,22.036 v1@56.874,22.036
  MidLayer2 w0.1: v4(18.525,21.825) 19.825,20.525 19.825,9.355 21.33,7.85 54.75,7.85 55.75,8.85 55.75,15.675 57.675,17.6 57.675,21.25 v1(56.875,22.05) ; v4(20.95,22.05) 21.85,21.15 21.85,19.2 22.225,18.825 26.282,18.825 27.175,19.718 27.175,24.275 26.825,24.625 26.825,25.6 v1@26.45,25.975
  Bottom Layer w0.1: U1_FL.54@19.725,22.05 v4(20.95,22.05)
  Bottom Layer w0.2: v4(18.525,21.825) 18.75,22.05 U1_FL.54@19.725,22.05
  other v1: 26.425,25.975
FLASH_R\P\: R2_FL.1 U1.F15 U1_FL.16 U2_FL.16 | length 24.2
  Top Layer w0.1: U1.F15@31.952,30.448 v1(32.45,29.95)
  Top Layer w0.2: U2_FL.16@36.425,15.55 v1(37.675,15.55)
  MidLayer2 w0.1: v1(32.45,29.95) 31.8,29.3 31.8,23.8 32.275,23.325 33.478,23.325 34.203,22.6 35.828,22.6 36.437,21.99 36.437,16.788 v1(37.675,15.55)
  Bottom Layer w0.2: v1(37.675,15.55) 40.675,15.55 R2_FL.1@41.025,15.9
FLASH_W\E\: U1.B3 U1_FL.55 U2_FL.55 | length 81.9
  Top Layer w0.1: U1.B3@43.927,26.449 44.4,25.976 44.4,25.325 45.25,24.475 46.35,24.475 48.2,22.625 54.225,22.625 54.3,22.55 55.583,22.55 U2_FL.55@55.597,22.536
  Top Layer w0.2: U2_FL.55@55.597,22.536 56.386,22.536 v1(56.875,23.025)
  MidLayer2 w0.1: v4(18.525,22.625) 20.15,21 20.15,9.455 21.53,8.075 54.5,8.075 55.45,9.025 55.45,15.799 57.275,17.624 57.275,20.8 56.3,21.775 56.3,22.45 v1(56.875,23.025)
  Bottom Layer w0.2: v4(18.525,22.625) 18.6,22.55 U1_FL.55@19.725,22.55